# Altium PCB QiTian Mini Flight Control.PcbDoc
Units mil, origin at the board's own origin, x right, y up, seen from the top; angles counter-clockwise.
Board outline 1840 x 2655 mil, 2 copper layers (Top Layer, Bottom Layer); 16 components, 18 nets, 82 pads, 5 vias.
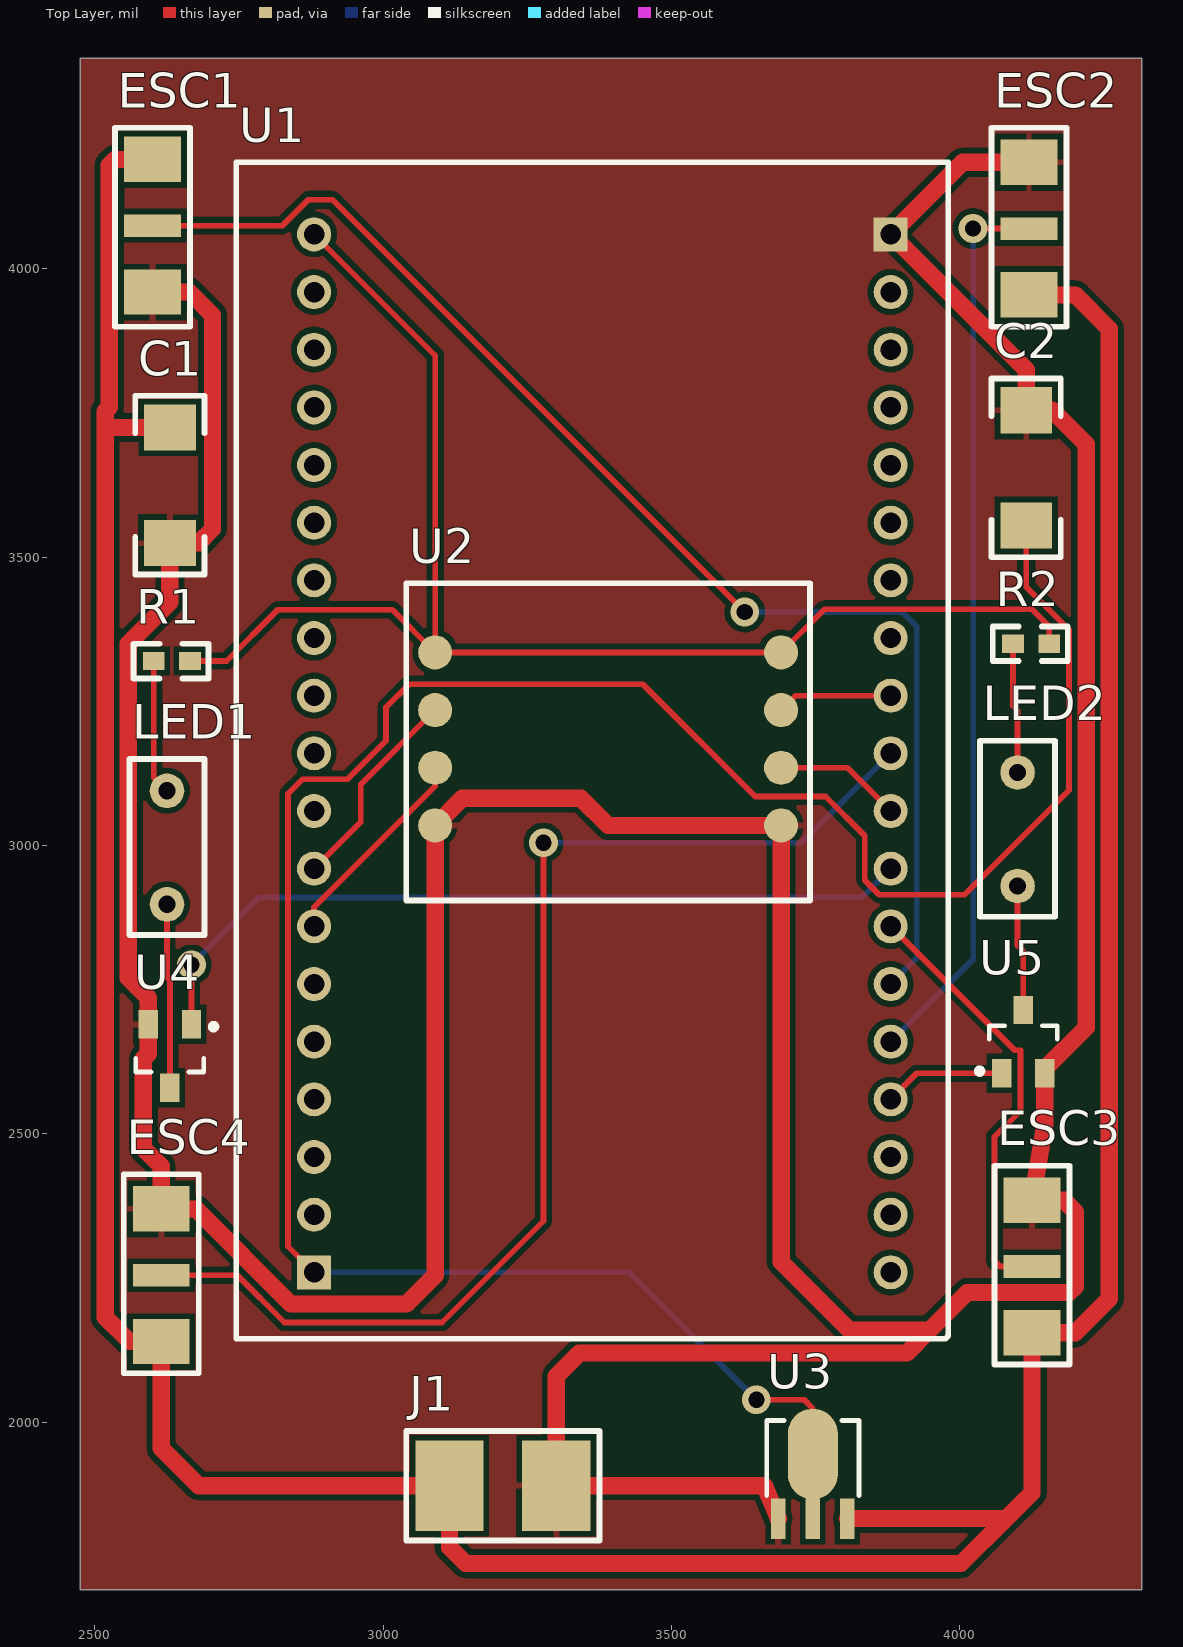
[diagram p0: Top Layer view]
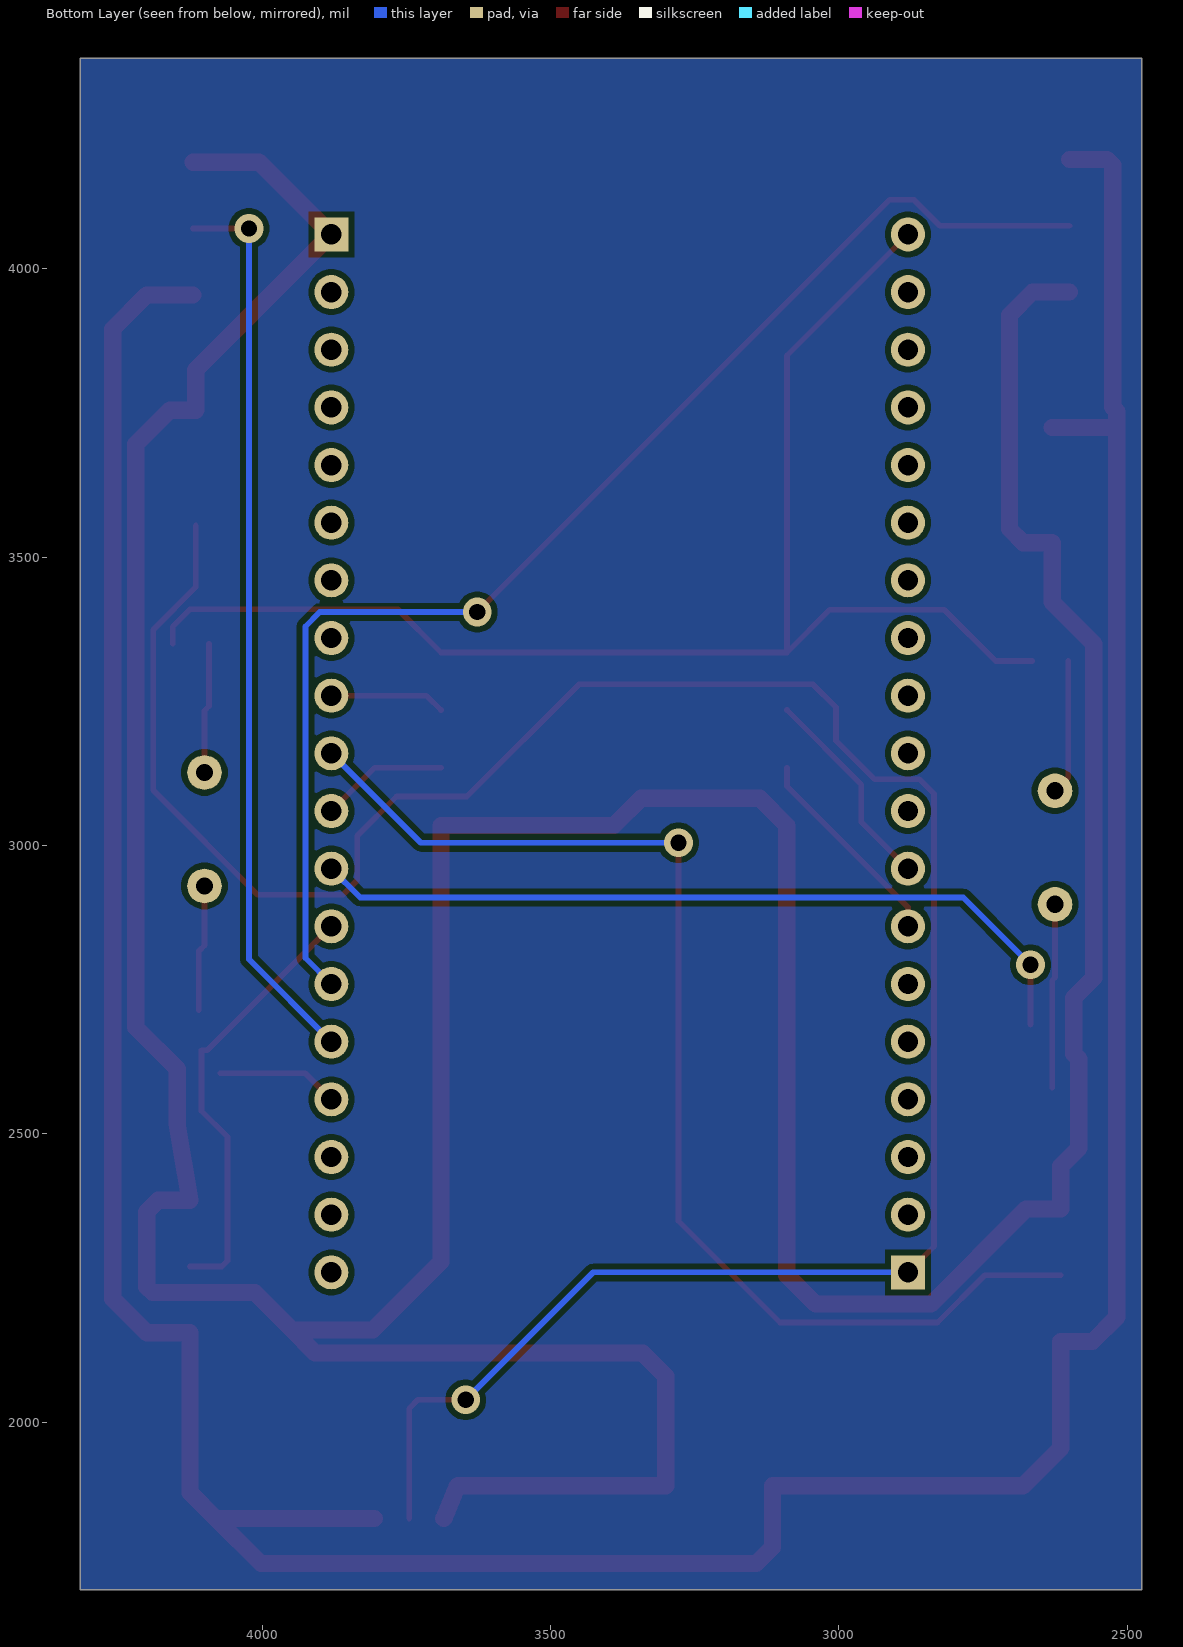
[diagram p1: Bottom Layer view, seen from below]

## Layer stack, top to bottom
Top Solder: solder mask 0.4, Solder Resist, Dk 3.5
Top Layer: signal copper 1.4
Dielectric 1: dielectric 12.6, FR-4, Dk 4.8
Bottom Layer: signal copper 1.4
Bottom Solder: solder mask 0.4, Solder Resist, Dk 3.5

## Board outline
2475,4365 2475,1710 4315,1710 4315,4365

## Design rules (kind name [scope] priority, off if disabled: settings)
Clearance [All] p1: gap=10 ignorepadtopadclearanceinfootprint=FALSE except(0: Arc-Hole Track-Hole SMDPad-Hole THPad-Hole Via-Hole Fill-Hole Poly-Hole Region-Hole Text-Hole)
PolygonConnect [All] p1: thpad.connectstyle=Direct thpad.reliefconductorwidth=10 thpad.reliefentries=4 thpad.polygonreliefangle="90 Angle" thpad.airgapwidth=10 smdpad.connectstyle=Relief smdpad.reliefconductorwidth=10 smdpad.reliefentries=4 smdpad.polygonreliefangle="90 Angle" smdpad.airgapwidth=10 via.connectstyle=Direct via.reliefconductorwidth=10 via.reliefentries=4 via.polygonreliefangle="90 Angle" via.airgapwidth=10
RoutingVias [All] p1: holewidth=28 width=50 viastyle="Through Hole" minholewidth=28 minwidth=50 maxholewidth=28 maxwidth=50
SolderMaskExpansion [All] p1: expansion=4 istentingtop=FALSE
Width Width_VCC [InNet('VCC')] p1: maxlimit=60 minlimit=30 preferedwidth=30 checkconnectedcopper=TRUE
Width Width_GND [InNet('GND')] p2: maxlimit=60 minlimit=30 preferedwidth=30 checkconnectedcopper=TRUE
Width [All] p3: maxlimit=10 minlimit=10 preferedwidth=10
30 further rules are at their usual default settings.

## Components (designator, comment, footprint, x,y, rotation, side; value= is the part's Value field where it differs from the comment)
C1 "100μF" 6032 2630,3525 r90 top
C2 "10μF" 6032 4115,3755 r270 top
ESC1 "ESC" ESC 2600,4190 r270 top
ESC2 "ESC" ESC 4120,3955 r90 top
ESC3 "ESC" ESC 4125,2155 r90 top
ESC4 "ESC" ESC 2615,2140 r90 top
J1 "J_2" J_2P 3115,1890 r0 top
LED1 "LED" J_2 2625,3095 r270 top
LED2 "LED" J_2 4100,3126.85 r270 top
R1 "200" 0603 2602.01,3320 r0 top
R2 "200" 0603 4092.01,3350 r0 top
U1 "ESP32" ESP32 3395,3140 r0 top
U2 "JY61" JY61 3090,3335 r0 top
U3 "AMS117" SOT-89 3745,1889 r0 top
U4 "U_S8050" SOT-23 2630,2635 r270 top
U5 "U_S8050" SOT-23 4110,2660 r90 top

## Footprints (in the part's own frame and the unit in brackets; to place one, negate y for a bottom-side part, rotate by r counter-clockwise, add the part's x,y. Pads: shape width x height; smd on the part's side, far side on the other; paste and mask are expansions set on the pad)
0603 [mm] "0603封装"
  rect 0.965x0.8 smd: 1(0,0) 2(1.6,0)
  silkscreen extent -0.89,-0.76 2.41,0.76
6032 [mm]
  rect 2.03x2.28 smd: 1(0,0) 2(5.08,0)
  silkscreen extent -1.4,-1.52 6.48,1.52
ESC [mm]
  rect 2x2.5 smd: 1(0,0) 3(5.842,0)
  rect 1x2.5 smd: 2(2.921,0)
  silkscreen extent -1.4,-1.65 7.37,1.65
ESP32 [mm] "ESP 开发底板"
  round 1.5 hole 0.9: 1(-13.081,23.368) 2(-13.081,20.828) 3(-13.081,18.288) 4(-13.081,15.748) 5(-13.081,13.208) 6(-13.081,10.668) 7(-13.081,8.128) 8(-13.081,5.588) 9(-13.081,3.048) 10(-13.081,0.508) 11(-13.081,-2.032) 12(-13.081,-4.572) 13(-13.081,-7.112) 14(-13.081,-9.652) 15(-13.081,-12.192) 16(-13.081,-14.732) 17(-13.081,-17.272) 18(-13.081,-19.812) 20(12.319,-22.352) 21(12.319,-19.812) 22(12.319,-17.272) 23(12.319,-14.732) 24(12.319,-12.192) 25(12.319,-9.652) 26(12.319,-7.112) 27(12.319,-4.572) 28(12.319,-2.032) 29(12.319,0.508) 30(12.319,3.048) 31(12.319,5.588) 32(12.319,8.128) 33(12.319,10.668) 34(12.319,13.208) 35(12.319,15.748) 36(12.319,18.288) 37(12.319,20.828)
  rect 1.5x1.5 hole 0.9: 19(-13.081,-22.352) 38(12.319,23.368)
  silkscreen extent -16.51,-25.27 14.86,26.54
J_2 [mil] "2端口接口"
  round 60 hole 30: 1(0,0) 2(196.85,0)
  silkscreen extent -55,-65 250,65
J_2P [mm]
  rect 3x4 smd: 1(0,0) 2(4.699,0)
  silkscreen extent -1.91,-2.41 6.6,2.41
JY61 [mm]
  round 1.5 smd: 1(0,0) 2(0,-2.54) 3(0,-5.08) 4(0,-7.62) 5(15.24,0) 6(15.24,-2.54) 7(15.24,-5.08) 8(15.24,-7.62)
  silkscreen extent -1.27,-10.92 16.51,3.05
SOT-23 [mm]
  rect 1.25x0.85 smd: 1(-1.395,0.95) 2(1.395,0) 3(-1.395,-0.95)
  silkscreen extent -1.42,-1.5 0.7,2.05, body extent -1.12,-1.47 1.17,1.45, height 1.04
SOT-89 [mil]
  rect 25x70 smd: 1(-60,-56) 2(0,-56) 3(60,-56)
  oval 86.61x157.48 smd: 2(0,56)
  silkscreen extent -80,-16 80,114, body extent -89,-68 88,99, height 61

## Part data
C1 C2: library part C, ComponentLink1Description="New link"
R1 R2: library part R
U1: library part U_ESP32, "ESP32开发底板"

## Via types
v1: diameter 50, hole 28, Top Layer to Bottom Layer, 5 vias

## Nets (pads, with @x,y where several pads share a name; then routed paths per layer and width w, separated by ;. In a path a pad name is that pad's centre, name@x,y a point inside that pad or via, vN(x,y) a via of type N, cw(c..) or ccw(c..) an arc to the next point about the centre after c; other vN are vias at no path point)
3.3V: R1.2 R2.2 U1.1 U2.1 U2.5 | length 2443
  Top Layer w10: R1.2 2728,3320 2817,3409 3016,3409 U2.1 ; U1.1 3090,3850 U2.1 ; R2.2 4155,3380 4125,3410 3765,3410 U2.5 U2.1
5V: C2.2 U1.19 U3.2 | length 4230
  Top Layer w10: U1.19 2835,2305 2835,3090 2860,3115 2938,3115 3005,3182 3005,3240 3045,3280 3450,3280 3645,3085 3767,3085 3835,3017 3835,2940 3860,2915 4008,2915 4189,3096 4189,3374.29 4115,3448.29 C2.2 ; v1(3647,2039) 3730,2039 3745,2024 3745,1945 U3.2@3745,1833
  Bottom Layer w10: U1.19 3426,2260 v1(3647,2039)
GND: C1.1 C2.1 ESC1.3 ESC2.3 ESC3.3 ESC4.3 J1.2 U1.38 U2.4 U2.8 U3.1 U4.3 U5.3 | length 8793.6
  Top Layer w30: ESC1.3 2664,3960 2704,3920 2704,3549 2680,3525 C1.1 2630,3422 2558,3350 2558,2770.6 2592.6,2736 U4.3 2592.6,2639 2584,2630.4 2584,2475 2615,2444 ESC4.3 2675,2370 2840,2205 3040,2205 3090,2255 U2.4 3137.25,3082.25 3342.75,3082.25 3390,3035 U2.8 3690,2278 3808,2160 3948,2160 ; U3.1 3661,1890 J1.2 3300,2080 3340,2120 3908,2120 3948,2160 ; ESC2.3 4005,4185 U1.38 4115,3825 C2.1 4160,3755 4219,3696 4219,2684.59 4147.4,2613 U5.3 4147.4,2517.4 ESC3.3 4180,2385 4200,2365 4200,2235 4190,2225 4013,2225 3948,2160
LED1: U1.23 U5.1 | length 211.3
  Top Layer w10: U1.23 3925.08,2605.08 U5.1
LED2: U1.27 U4.1 | length 1385.1
  Top Layer w10: U4.1 v1(2667.4,2793.4)
  Bottom Layer w10: v1(2667.4,2793.4) 2784,2910 3830,2910 U1.27
NetLED1_1: LED1.1 R1.1 | length 234.5
  Top Layer w10: R1.1 2602.01,3117.99 LED1.1
NetLED1_2: LED1.2 U4.2 | length 320.1
  Top Layer w10: LED1.2 2625,2771.14 2630,2766.14 U4.2
NetLED2_1: LED2.1 R2.1 | length 226.5
  Top Layer w10: R2.1 4092.01,3241.99 4100,3234 LED2.1
NetLED2_2: LED2.2 U5.2 | length 219.2
  Top Layer w10: LED2.2 4100,2827 4110,2817 U5.2
PWM1: ESC1.2 U1.25 | length 2288.8
  Top Layer w10: ESC1.2 2825,4075 2870,4120 2912,4120 v1(3627,3405)
  Bottom Layer w10: v1(3627,3405) 3900,3405 3925,3380 3925,2805 U1.25
PWM2: ESC2.2 U1.24 | length 1566.2
  Top Layer w10: v1(4023,4070) ESC2.2
  Bottom Layer w10: U1.24 4023,2803 v1(4023,4070)
PWM3: ESC3.2 U1.26 | length 766.8
  Top Layer w10: U1.26 4095,2645 4105,2645 4105,2540 4060,2495 4060,2280 4070,2270 ESC3.2
PWM4: ESC4.2 U1.29 | length 2092.1
  Top Layer w10: ESC4.2 2747,2255 2829,2173 3102,2173 3278,2349 v1(3278,3005)
  Bottom Layer w10: v1(3278,3005) 3725,3005 U1.29
RX_G: U1.12 U2.2 | length 362
  Top Layer w10: U1.12 2960.95,3040.95 2960.95,3105.95 U2.2
SCL_G: U1.30 U2.6 | length 200.4
  Top Layer w10: U2.6 3715,3260 U1.30
SDA_G: U1.28 U2.7 | length 221.1
  Top Layer w10: U2.7 3805,3135 U1.28
TX_G: U1.13 U2.3 | length 362
  Top Layer w10: U1.13 2880,2893 3090,3103 U2.3
VCC: C1.2 ESC1.1 ESC2.1 ESC3.1 ESC4.1 J1.1 U3.3 | length 6753.8
  Top Layer w30: ESC1.1 2535,4190 2525,4180 2525,3760 2518,3753 2518,3725 ; C1.2 2518,3725 ; U3.3 4080,1833 ; ESC2.1 4200,3955 4259,3896 4259,2214 4200,2155 ESC3.1 4125,1878 4080,1833 ; 2518,3725 2518,2182 2560,2140 ESC4.1 2615,1955 2680,1890 J1.1 3115,1783 3143,1755 4002,1755 4080,1833
pads on no net: U1.2 U1.3 U1.4 U1.5 U1.6 U1.7 U1.8 U1.9 U1.10 U1.11 U1.14 U1.15 U1.16 U1.17 U1.18 U1.20 U1.21 U1.22 U1.31 U1.32 U1.33 U1.34 U1.35 U1.36 U1.37

## Polygon pours and split planes (outlines as drawn)
GND on Top Layer "GND_L01_P000" (solid, remove dead copper, pour order 0): 2475,4365 2475,1710 4315,1710 4315,4365
no net on Bottom Layer "NONET_L02_P004" (solid, pour order 4): 2475,4365 2475,1710 4315,1710 4315,4365